# Allegro board isolated_v-i_dac.brd
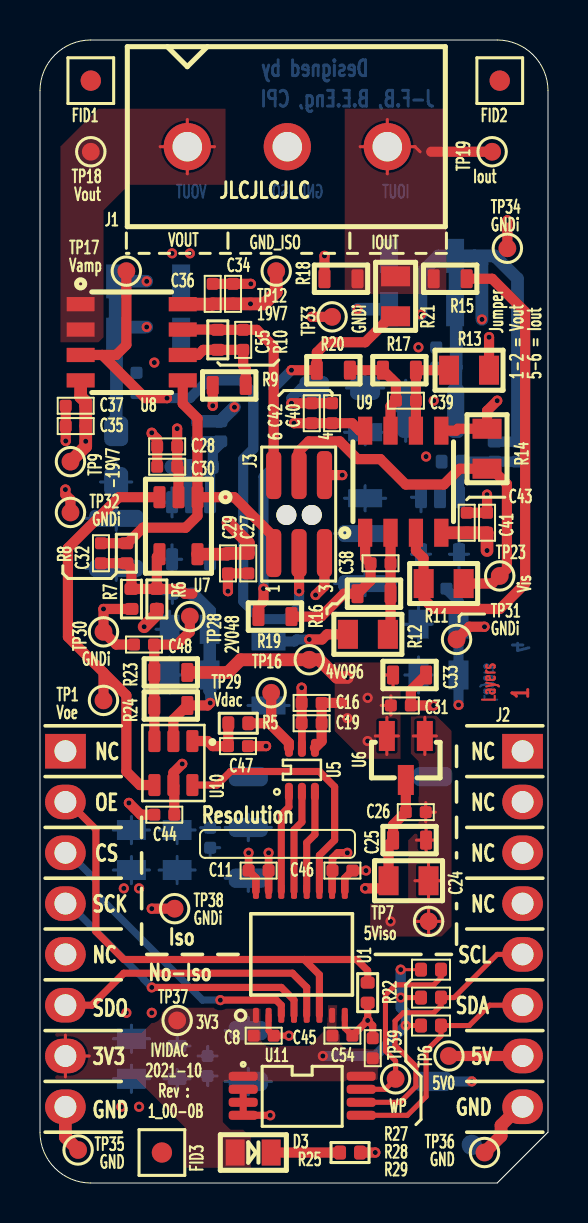
[diagram p0: board, top side]
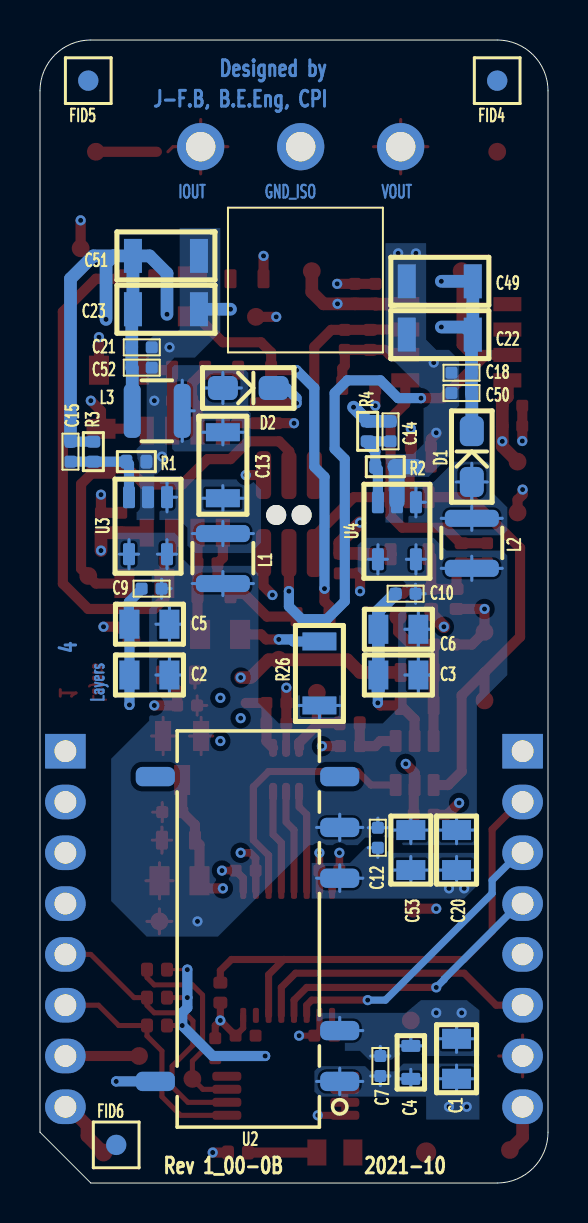
[diagram p1: board, bottom side, seen from below]

Outline 25.4 x 57.15 mm; copper layers: TOP, INNER1, INNER2, BOTTOM. Coordinates in mm from the lower left corner of the outline.
Outline path: 0,54.61 0,2.54 arc(0.74,0.74) 2.54,0 22.86,0 25.4,2.54 25.4,54.61 arc(24.66,56.41) 22.86,57.15 2.54,57.15 arc(0.74,56.41) 0,54.61

## Design rules (mm)
constraint set DEFAULT: min track width 0.152

## Placement (name value [footprint] x y rotation side)
C1  10uF  [0805_CAP]  4.57 7.11 270 bottom
C2  22uF  [0805_CAP]  20.83 25.4 180 bottom
C3  22uF  [0805_CAP]  8.38 25.4 180 bottom
C4  1uF  [0603_CAP_IPC]  6.86 6.86 270 bottom
C5  22uF  [0805_CAP]  20.83 27.94 180 bottom
C6  22uF  [0805_CAP]  8.38 27.69 180 bottom
C7  0.1uF  [0402_CAP_IPC]  8.38 6.35 270 bottom
C8  0.1uF  [0402_CAP_IPC]  11.68 7.37 180 top
C9  0.1uF  [0402_CAP_IPC]  20.32 29.72 180 bottom
C10  0.1uF  [0402_CAP_IPC]  7.62 29.46 180 bottom
C11  0.1uF  [0402_CAP_IPC]  11.43 15.62 180 top
C12  0.1uF  [0402_CAP_IPC]  8.51 16.76 90 bottom
C13  1uF  [1206_CAP]  16.26 37.34 270 bottom
C14  680pF  [0402_CAP_IPC]  7.87 37.08 90 bottom
C15  560pF  [0402_CAP_IPC]  23.88 36.07 90 bottom
C16  0.1uF  [0402_CAP_IPC]  13.08 24 0 top
C18  0.1uF  [0402_CAP_IPC]  4.83 40.51 180 bottom
C19  10nF  [0402_CAP_IPC]  13.08 22.99 0 top
C20  10uF  [0805_CAP]  4.57 15.75 90 bottom
C21  0.1uF  [0402_CAP_IPC]  19.81 41.78 0 bottom
C22  10uF  [1206_CAP]  6.86 42.42 180 bottom
C23  10uF  [1206_CAP]  17.65 43.69 0 bottom
C24  10uF  [0805_CAP]  17.53 15.11 0 top
C25  1uF  [0603_CAP_IPC]  17.65 17.14 0 top
C26  0.1uF  [0402_CAP_IPC]  18.29 18.54 0 top
C27  0.1uF  [0402_CAP_IPC]  10.41 30.48 90 top
C28  0.1uF  [0402_CAP_IPC]  6.86 36.83 180 top
C29  10nF  [0402_CAP_IPC]  9.4 30.48 90 top
C30  10nF  [0402_CAP_IPC]  6.86 35.81 180 top
C31  0.1uF  [0402_CAP_IPC]  18.54 23.88 180 top
C32  22pF  [0402_CAP_IPC]  3.05 30.99 90 top
C33  1uF  [0603_CAP_IPC]  19.3 25.4 180 top
C34  0.1uF  [0402_CAP_IPC]  9.65 44.96 270 top
C35  0.1uF  [0402_CAP_IPC]  2.29 37.85 180 top
C36  10nF  [0402_CAP_IPC]  8.64 44.96 270 top
C37  10nF  [0402_CAP_IPC]  2.29 38.86 180 top
C38  100pF  [0402_CAP_IPC]  17.53 30.99 180 top
C39  100pF  [0402_CAP_IPC]  18.8 39.12 180 top
C40  0.1uF  [0402_CAP_IPC]  13.59 38.99 270 top
C41  0.1uF  [0402_CAP_IPC]  22.35 32.51 90 top
C42  10nF  [0402_CAP_IPC]  14.61 38.99 270 top
C43  10nF  [0402_CAP_IPC]  21.34 32.51 90 top
C44  0.1uF  [0402_CAP_IPC]  5.71 18.41 0 top
C45  0.1uF  [0402_CAP_IPC]  15.62 7.37 180 top
C46  0.1uF  [0402_CAP_IPC]  15.62 15.62 180 top
C47  1nF  [0402_CAP_IPC]  9.4 21.84 0 top
C48  0.1uF  [0402_CAP_IPC]  4.7 26.92 0 top
C49  10uF  [1206_CAP]  6.86 45.09 180 bottom
C50  1nF  [0402_CAP_IPC]  4.83 39.5 180 bottom
C51  10uF  [1206_CAP]  17.65 46.35 0 bottom
C52  1nF  [0402_CAP_IPC]  19.81 40.77 0 bottom
C53  10uF  [0805_CAP]  6.86 15.75 90 bottom
C54  0.1uF  [0402_CAP_IPC]  16.64 7.24 270 top
C55  22pF  [0402_CAP_IPC]  10.16 41.66 90 top
D1  SD103AWS-TP  [SOD323]  3.81 35.05 90 bottom
D2  SD103AWS-TP  [SOD323]  16.26 39.75 180 bottom
D3  LED GREEN  [0603_LED]  11.56 1.52 180 top
FID1  Fiducial  [FIDUCIAL_CIR40MIL]  2.54 55.12 0 top
FID2  Fiducial  [FIDUCIAL_CIR40MIL]  22.99 55.12 0 top
FID3  Fiducial  [FIDUCIAL_CIR40MIL]  6.1 1.52 0 top
FID4  Fiducial  [FIDUCIAL_CIR40MIL]  2.54 55.12 180 bottom
FID5  Fiducial  [FIDUCIAL_CIR40MIL]  22.99 55.12 180 bottom
FID6  Fiducial  [FIDUCIAL_CIR40MIL]  21.59 1.91 180 bottom
J1  HEADER 3  [PHOENIX3]  7.37 51.82 0 top
J2  ClickBoard  [MIKROBUS-CLICKBOARD]  -1.27 1.27 0 top
J3  Header 2x3 1,27mm  [HEADER2X3_1_27MM_POST]  11.68 31.5 0 top
L1  10uH  [IND_1008]  16.26 29.97 90 bottom
L2  10uH  [IND_1008]  3.81 30.73 90 bottom
L3  10uH  [IND_1008]  18.29 38.61 0 bottom
R1  1K96  [0402_RES_IPC]  21.08 36.07 180 bottom
R2  13K30  [0402_RES_IPC]  8.64 35.81 180 bottom
R3  29K4  [0402_RES_IPC]  22.73 36.07 90 bottom
R4  200K  [0402_RES_IPC]  9.02 37.08 90 bottom
R5  2K74  [0402_RES_IPC]  10.41 22.99 180 top
R6  5K90  [0402_RES_IPC]  5.84 28.7 90 top
R7  8K450  [0402_RES_IPC]  4.57 28.7 90 top
R8  16K20  [0402_RES_IPC]  4.32 30.99 90 top
R9  10K0  [0603_RES_IPC]  10.29 39.88 180 top
R10  5K90  [0402_RES_IPC]  8.89 41.66 90 top
R11  453K  [0805_RES_IPC]  21.08 29.97 180 top
R12  453K  [0805_RES_IPC]  15.49 27.43 0 top
R13  453K  [0805_RES_IPC]  22.35 40.64 180 top
R14  453K  [0805_RES_IPC]  22.35 35.81 90 top
R15  10K0  [0603_RES_IPC]  21.34 45.21 180 top
R16  10K0  [0603_RES_IPC]  17.53 29.46 180 top
R17  10K0  [0603_RES_IPC]  18.8 40.64 180 top
R18  10K0  [0603_RES_IPC]  14.22 45.21 0 top
R19  15R0  [0603_RES_IPC]  10.92 28.32 0 top
R20  15R0  [0603_RES_IPC]  15.49 40.64 180 top
R21  10R0  [0805_RES_IPC]  17.78 43.43 90 top
R22  10K0  [0402_RES_IPC]  16.38 9.02 90 top
R23  10K0  [0603_RES_IPC]  7.37 25.53 180 top
R24  10K0  [0603_RES_IPC]  5.71 23.88 0 top
R25  1K96  [0402_RES_IPC]  16 1.52 180 top
R26  249R  [1206_RES]  11.43 23.88 90 bottom
R27  10K0  [0402_RES_IPC]  19.05 10.67 0 top
R28  10K0  [0402_RES_IPC]  19.05 9.27 0 top
R29  10K0  [0402_RES_IPC]  19.05 7.87 0 top
TP1  test_pad  [TEST_PAD_CIR_35MIL]  3.17 24.13 0 top
TP6  test_pad  [TEST_PAD_CIR_35MIL]  20.45 6.35 0 top
TP7  test_pad  [TEST_PAD_CIR_35MIL]  19.43 13.08 0 top
TP9  test_pad  [TEST_PAD_CIR_35MIL]  1.52 36.07 0 top
TP12  test_pad  [TEST_PAD_CIR_35MIL]  11.81 45.59 0 top
TP16  test_pad  [TEST_PAD_CIR_35MIL]  13.46 26.16 0 top
TP17  test_pad  [TEST_PAD_CIR_35MIL]  4.32 45.59 0 top
TP18  test_pad  [TEST_PAD_CIR_35MIL]  2.54 51.56 0 top
TP19  test_pad  [TEST_PAD_CIR_35MIL]  22.61 51.56 0 top
TP23  test_pad  [TEST_PAD_CIR_35MIL]  22.99 30.35 0 top
TP28  test_pad  [TEST_PAD_CIR_35MIL]  7.49 28.32 0 top
TP29  test_pad  [TEST_PAD_CIR_35MIL]  11.56 24.51 0 top
TP30  test_pad  [TEST_PAD_CIR_35MIL]  3.17 27.56 0 top
TP31  test_pad  [TEST_PAD_CIR_35MIL]  20.83 27.18 0 top
TP32  test_pad  [TEST_PAD_CIR_35MIL]  1.52 33.53 0 top
TP33  test_pad  [TEST_PAD_CIR_35MIL]  14.61 43.31 0 top
TP34  test_pad  [TEST_PAD_CIR_35MIL]  23.37 46.74 0 top
TP35  test_pad  [TEST_PAD_CIR_35MIL]  1.91 1.65 0 top
TP36  test_pad  [TEST_PAD_CIR_35MIL]  22.23 1.52 0 top
TP37  test_pad  [TEST_PAD_CIR_35MIL]  6.86 8.13 0 top
TP38  test_pad  [TEST_PAD_CIR_35MIL]  6.73 13.72 0 top
TP39  test_pad  [TEST_PAD_CIR_35MIL]  17.78 5.21 0 top
U1  ADUM7440ARQZ  [QSOP-16]  10.79 8.38 0 top
U2  DCPA10505P-U/700  [DCPA10505P]  10.41 5.08 90 bottom
U3  LM2611BMF  [SOT23-5]  19.05 34.29 0 bottom
U4  LMR64010XMFE/NOPB  [SOT23-5]  6.6 34.04 0 bottom
U5  AD5641BKSZ  [SC70-6]  12.45 19.56 0 top
U6  REF3140AQDBZRQ1  [SOT23-3]  19.3 22.35 270 top
U7  TLV9351IDBVR  [SOT23-5]  7.87 34.29 180 top
U8  TLV9352IDR  [SOIC-8]  2.03 43.94 0 top
U9  TLV9352IDR  [SOIC-8]  16.26 32.51 90 top
U10  74LVC1G3157  [SOT23-6]  7.62 22.1 180 top
U11  24LC512-I/ST  [TSSOP8_4MM_065MM]  10.16 5.33 0 top

## Library data of the parts
C1-C16 C18-C55 = CAP-NP
D1 D2 = Diode Schottky
D3 = LED
FID1-FID6 = Fiducial
J1 = HEADER 3
J2 = ClickBoard-add-on_0
J3 = Header2x3_1_27mm
L1-L3 = Inductor
R1-R29 = Resistor
TP1 TP6 TP7 TP9 TP12 TP16-TP19 TP23 TP28-TP39 = test_pad
U1 = ADuM7440ARQZ
U2 = DCPA10505P
U3 = LM2611BMF
U4 = LMR64010XMFE
U5 = AD5641
U6 = REF3140AQDBZR
U7 = TLV9351IDBVR
U8 U9 = TLV9352IDR
U10 = 74LVC1G3157
U11 = IC_EEPROM_512Kx8_I2C_TSSOP8

## Footprints (pads in the part's own frame, mm; a bottom-side part is the same pattern mirrored in y, then rotated)
0402_CAP_IPC
  rrect 0.6x0.6 smd: 1(0,0) 2(1,0)
0402_RES_IPC
  rrect 0.6x0.7 smd: 1(0,0) 2(1,0)
0603_CAP_IPC
  rrect 0.6x0.95 smd: 1(0,0) 2(1.651,0)
0603_LED
  rect 0.95x1.3 smd: 1(0,0) 2(1.8,0)
0603_RES_IPC
  rrect 0.6x0.95 smd: 1(0,0) 2(1.651,0)
0805_CAP
  rect 1x1.45 smd: 1(-0.1,0) 2(1.9,0)
0805_RES_IPC
  rect 1x1.45 smd: 1(-0.1,0) 2(1.9,0)
1206_CAP
  rect 0.9x1.7 smd: 1(-0.2,0) 2(3.1,0)
1206_RES
  rect 0.9x1.7 smd: 1(0,0) 2(3.2,0)
DCPA10505P
  rrect 0.965x1.956 smd: 1(0,0) 2(2.54,0) 3(10.16,0) 4(12.7,0) 5(15.24,0) 6(15.24,9.22) 7(0,9.22)
FIDUCIAL_CIR40MIL
  round 1.016 smd: 1(0,0)
HEADER2X3_1_27MM_POST
  round 1 hole 1 unplated: (0.635,1.905) (1.905,1.905)
  rrect 0.76x2.4 smd: 1(0,0) 2(1.27,0) 3(2.54,0) 4(2.54,3.9) 5(1.27,3.9) 6(0,3.9)
IND_1008
  rrect 0.85x2.7 smd: 1(0,0) 2(2.5,0)
MIKROBUS-CLICKBOARD
  rect 2.032x1.727 hole 1.092: 1(2.54,20.32) 16(25.4,20.32)
  oval 2.032x1.727 hole 1.092: 2(2.54,17.78) 3(2.54,15.24) 4(2.54,12.7) 5(2.54,10.16) 6(2.54,7.62) 7(2.54,5.08) 8(2.54,2.54) 9(25.4,2.54) 10(25.4,5.08) 11(25.4,7.62) 12(25.4,10.16) 13(25.4,12.7) 14(25.4,15.24) 15(25.4,17.78)
PHOENIX3
  round 2.362 hole 1.473: 1(0,0) 2(5,0) 3(10,0)
QSOP-16
  rrect 0.3x0.75 smd: 1(0,0) 2(0.635,0) 3(1.27,0) 4(1.905,0) 5(2.54,0) 6(3.175,0) 7(3.81,0) 8(4.445,0) 9(4.445,6.198) 10(3.81,6.198) 11(3.175,6.198) 12(2.54,6.198) 13(1.905,6.198) 14(1.27,6.198) 15(0.635,6.198) 16(0,6.198)
SC70-6
  rrect 0.4x0.9 smd: 1(0,0) 2(0.65,0) 3(1.3,0) 4(1.3,2.2) 5(0.65,2.2) 6(0,2.2)
SOD323
  rrect 1.5x1.2 smd: 1(0,0) 2(2.54,0)
SOIC-8
  rect 1.397x0.711 smd: 1(0,0) 2(0,-1.27) 3(0,-2.54) 4(0,-3.81) 5(5.105,-3.81) 6(5.105,-2.54) 7(5.105,-1.27) 8(5.105,0)
SOT23-3
  rect 1.5x0.8 smd: 1(0,-0.061) 2(0,-1.961) 3(2.2,-1.011)
SOT23-5
  rrect 0.6x1.1 smd: 1(0,0) 2(0.95,0) 3(1.9,0) 4(1.9,2.85) 5(0,2.85)
SOT23-6
  rrect 0.6x1.1 smd: 1(0,0) 2(0.95,0) 3(1.9,0) 4(1.9,2.2) 5(0.95,2.2) 6(0,2.2)
TEST_PAD_CIR_35MIL
  round 0.889 smd: 1(0,0)
TSSOP8_4MM_065MM
  rrect 1.45x0.45 smd: 1(0,0) 2(0,-0.65) 3(0,-1.3) 4(0,-1.95) 5(5.9,-1.95) 6(5.9,-1.3) 7(5.9,-0.65) 8(5.9,0)

## Nets
2V048: C48.2 R23.2 R24.1 TP28.1(TEST) U10.3
3V3: C8.2 C45.2 C54.2 D3.2 J2.7 R27.1 R28.1 R29.1 TP37.1(TEST) U1.1 U1.7 U11.1 U11.8
4V096ISO: C11.2 C16.2 C19.2 C31.2 C33.2 C44.2 C46.2 R6.1 R23.1 TP16.1(TEST) U1.10(VDD2B) U1.16 U5.4(VREF) U6.2(VOUT) U10.5(VCC)
5V0: C1.2 C4.2 C7.2 J2.10 TP6.1(TEST) U2.1
5VISO: C2.2 C3.2 C5.2 C6.2 C9.2 C10.2 C12.2 C20.2 C24.2 C25.2 C26.2 C53.2 L1.1 L2.1 R26.1 TP7.1(TEST) U2.4 U3.4 U3.5(VIN) U4.4 U4.5(VIN) U6.1
19V7ISO: C14.2 C18.2 C22.2 C27.2 C29.2 C34.2 C36.2 C40.2 C42.2 C49.2 C50.2 D1.2(K) R4.2 TP12.1(TEST) U7.5 U8.8 U9.8
-19V7ISO: C15.2 C21.2 C23.2 C28.1 C30.1 C35.1 C37.1 C41.1 C43.1 C51.2 C52.2 L3.2 R3.2 TP9.1(TEST) U7.2(V-) U8.4(V-) U9.4(V-)
GND: C1.1 C4.1 C7.1 C8.1 C45.1 C54.1 J2.8 J2.9 R22.1 R25.1 TP35.1(TEST) TP36.1(TEST) U1.2 U1.8 U2.2 U2.7(SYNC) U11.2 U11.3 U11.4
GND_ISO: C2.1 C3.1 C5.1 C6.1 C9.1 C10.1 C11.1 C12.1 C16.1 C18.1 C19.1 C20.1 C21.1 C22.1 C23.1 C24.1 C25.1 C26.1 C27.1 C28.2 C29.1 C30.2 C31.1 C33.1 C34.1 C35.2 C36.1 C37.2 C40.1 C41.2 C42.1 C43.2 C44.1 C46.1 C47.2 C48.1 C49.1 C50.1 C51.1 C52.1 C53.1 D2.2(K) J1.2 J3.3 J3.4 R1.2 R2.2 R7.1 R9.2 R12.1 R13.1 R24.2 R26.2 TP30.1(TEST) TP31.1(TEST) TP32.1(TEST) TP33.1(TEST) TP34.1(TEST) TP38.1(TEST) U1.9 U1.15 U2.3 U3.2 U4.2 U5.5 U6.3 U10.2
DAC_CSN: J2.3 U1.3
DAC_MOSI: J2.6 U1.5
IOUT: J1.3 R15.2 R18.2 R21.2 TP19.1(TEST)
OUT_EN: J2.2 R22.2 U1.6
SCK: J2.4 U1.4
SCL: J2.12 R28.2 U11.6
SDA: J2.11 R29.2 U11.5
VAMP: J3.2 TP17.1(TEST) U8.3
VDAC: R5.1 TP29.1(TEST) U5.6
VDAC_FILT: C47.1 R5.2 U10.1
VISC: J3.5 R11.1 R14.1 TP23.1(TEST)
VOE: TP1.1(TEST) U7.3 U10.4
VOUT: J1.1 TP18.1(TEST) U8.1 U8.2
WP: R27.2 TP39.1(TEST) U11.7(WP)
N02659: C32.1 R6.2 R7.2 R8.1 U7.4
N02929: C32.2 J3.1 R8.2 U7.1 U8.5
N03627: C55.1 R9.1 R10.1 U8.6
N03989: R11.2 R15.1 U9.3
N04068: C38.2 R16.2 R19.2 U9.1
N04246: C38.1 R12.2 R16.1 U9.2
N08088: R14.2 R18.1 U9.5
N08142: C39.2 R17.2 R20.1 U9.7
N08158: C39.1 R13.2 R17.1 U9.6
N08933: R19.1 R20.2 R21.1
N30227: U1.14 U5.1
N30231: U1.13 U5.2
N30243: U1.12 U5.3
N36112: C13.2 L1.2 U3.1
N36135: C13.1 D2.1 L3.1
N37664: C15.1 R1.1 R3.1 U3.3
N40846: D1.1 L2.2 U4.1
N41384: C14.1 R2.1 R4.1 U4.3
N64354: U1.11 U10.6
N145790: D3.1(CATHODE) R25.2
N253978: C55.2 J3.6 R10.2 U8.7

Pads without a net: FID1 1; FID2 1; FID3 1; FID4 1; FID5 1; FID6 1; J2 1 5 13 14 15 16; U2 5 6

## Via types
v1: diameter 0.508, hole 0.254, TOP to BOTTOM, 76 vias

## Routing (per net, layer and track width the routed paths; a pad name or vN(x,y) marks a point on that pad's centre or on a via; arc(x,y) is an arc through that point)
2V048: length 7.7
  TOP w0.508: TP28.1 7.49,27.56 6.86,26.92 C48.2 5.71,26.91 R23.2 R24.1 5.72,23.87 U10.3
3V3: length 13.7
  TOP w0.152: 1.27,5.31 J2.7 ; J2.7 1.27,7.39 ; J2.7 2.46,6.35 ; R27.1 v1(18.03,10.67)
  TOP w0.254: R28.1 v1(18.03,9.27) ; R29.1 v1(18.29,7.87)
  BOTTOM w0.508: v1(14.14,6.35) 16.76,6.35 v1(18.29,7.87) 18.29,8.51 18.03,8.76 v1(18.03,9.27) v1(18.03,10.67)
4V096ISO: length 26.1
  TOP w0.152: 17.54,23.4 C31.2 ; C31.2 17.54,24.35 ; C31.2 17.06,23.88 ; U6.2 17.34,23.28 ; U6.2 17.34,21.42 ; U6.2 17.92,22.35 ; U6.2 16.76,22.35 ; 17.65,24.75 C33.2 17.17,25.4
  TOP w0.381: 14.86,25.27 14.8,25.34 ; U1.16 10.79,15.26 C11.2 v1(10.43,16.51) ; U1.10 14.61,15.6 C46.2 14.62,16.24 14.89,16.51 v1(15.37,16.51)
  TOP w0.508: C44.2 6.71,19.85 U10.5 6.67,20.51 v1(7.11,20.95) ; 15.11,24 C16.2 C19.2 14.08,22.09 U5.4
  TOP w0.635: v1(15.37,25.27) 14.86,25.27 ; R23.1 9.4,25.53 10.03,26.16 TP16.1 13.97,26.16 14.8,25.34 ; v1(5.21,27.81) 5.84,28.45 R6.1
  vias: v1(15.37,23.24) v1(16.38,24.26) v1(16.38,22.1)
5V0: length 17.5
  TOP w0.508: J2.10 TP6.1
  INNER2 w0.152: J2.10 24.13,7.39 ; J2.10 24.13,5.31 ; J2.10 22.94,6.35
  BOTTOM w0.152: U2.1 11.57,5.08 ; U2.1 9.26,5.08 ; U2.1 10.41,4.42 ; U2.1 10.41,5.74 ; 4.57,4.53 C1.2 ; C1.2 5.48,5.21 ; C1.2 3.67,5.21 ; C1.2 4.57,5.89 ; 8.38,4.87 C7.2 ; C7.2 8.86,5.35 ; C7.2 7.9,5.35 ; 6.2,5.21 C4.2 ; C4.2 6.86,5.69 ; C4.2 7.51,5.21 ; C4.2 6.86,4.73
  vias: v1(4.06,3.81) v1(4.95,3.81)
5VISO: length 60.2
  TOP w0.152: TP7.1 20.05,13.08 ; TP7.1 18.81,13.08 ; TP7.1 19.43,12.46 ; TP7.1 19.43,13.7 ; U6.1 19.24,23.28 ; U6.1 19.82,22.35 ; U6.1 18.66,22.35 ; U6.1 19.24,21.42 ; 18.75,15.11 C24.2 ; C24.2 19.43,14.21 ; C24.2 20.1,15.11 ; C24.2 19.43,16.02 ; 19.3,16.49 C25.2 ; C25.2 18.83,17.14 ; C25.2 19.3,17.8 ; C25.2 19.78,17.14 ; C26.2 19.77,18.54 ; C26.2 19.29,18.06 ; C26.2 19.29,19.02
  BOTTOM w0.152: 20.95,30.71 U3.4 ; U3.4 20.95,32.17 ; U3.4 20.47,31.44 ; U3.4 21.43,31.44 ; 18.93,24.5 C2.2 ; C2.2 18.93,26.3 ; C2.2 19.61,25.4 ; C2.2 18.25,25.4 ; C53.2 7.76,17.65 ; C53.2 5.95,17.65 ; C53.2 6.86,16.97 ; C53.2 6.86,18.33 ; 8.03,31.19 U4.4 ; U4.4 8.5,30.46 ; U4.4 8.5,31.91 ; U4.4 8.98,31.19 ; U3.5 19.05,32.17 ; U3.5 18.57,31.44 ; U3.5 19.53,31.44 ; U3.5 19.05,30.71 ; C3.2 7.16,25.4 ; C3.2 5.8,25.4 ; C3.2 6.48,24.5 ; C3.2 6.48,26.3 ; C6.2 7.16,27.69 ; C6.2 6.48,26.78 ; C6.2 6.48,28.59 ; C6.2 5.8,27.69 ; L1.1 17.78,29.97 ; L1.1 14.73,29.97 ; L1.1 16.26,30.58 ; L1.1 16.26,29.37 ; C5.2 19.61,27.94 ; C5.2 18.93,27.04 ; C5.2 18.25,27.94 ; C5.2 18.93,28.84 ; 11.43,23.25 R26.1 ; R26.1 12.46,23.88 ; R26.1 10.4,23.88 ; 3.81,30.13 L2.1 ; L2.1 5.34,30.73 ; L2.1 2.28,30.73 ; L2.1 3.81,31.34 ; C20.2 5.48,17.65 ; C20.2 4.57,16.97 ; C20.2 4.57,18.33 ; C20.2 3.67,17.65 ; U2.4 11.57,17.78 ; U2.4 10.41,18.44 ; U2.4 9.26,17.78 ; U2.4 10.41,17.12 ; 6.13,31.19 U4.5 ; U4.5 6.6,30.46 ; U4.5 7.08,31.19 ; U4.5 6.6,31.91 ; C10.2 6.62,29.94 ; C10.2 6.14,29.46 ; C10.2 6.62,28.99 ; 19.32,29.24 C9.2 ; C9.2 18.84,29.72 ; C9.2 19.32,30.2 ; 8.03,17.76 C12.2 ; C12.2 8.99,17.76 ; C12.2 8.51,18.24
  vias: v1(17.53,13.08)
19V7ISO: length 53
  TOP w0.508: U9.8 15.98,37.62 15.6,37.99 C42.2 C40.2 v1(12.7,37.99)
  TOP w0.635: TP12.1 11.81,44.55 11.22,43.96 v1(10.52,43.96) C34.2 C36.2 8.62,43.94 U8.8 ; U7.5 9.36,31.44 C29.2 C27.2 10.41,32 v1(9.4,33.02)
  INNER2 w0.635: v1(5.33,42.8) 7.24,42.8 9.72,40.31 v1(9.72,38.79) 9.72,38.09 9.4,37.77 v1(9.4,33.02) ; v1(5.33,45.09) 8.26,45.09 9.38,43.96 v1(10.52,43.96) 11.43,43.05 11.43,38.56 12,37.99 v1(12.7,37.99)
  BOTTOM w0.635: C22.2 4.14,42.8 v1(5.33,42.8) ; C22.2 C49.2 v1(5.33,45.09) ; C22.2 3.83,42.35 C18.2 C50.2 3.81,39.48 D1.2 ; v1(9.72,38.79) R4.2 C14.2
-19V7ISO: length 89.2
  TOP w0.508: v1(6.86,37.72) C28.1 C30.1 6.92,35.75 U7.2
  TOP w0.635: v1(22.35,31.62) C41.1 C43.1 U9.4 ; U8.4 2.03,39.31 2.29,39.06 C37.1 C35.1 v1(2.29,37.08) 2.29,36.83 TP9.1
  INNER2 w0.635: v1(2.29,37.08) 2.29,33.53 4.7,31.11 8.64,31.11 ; v1(22.35,31.62) 21.34,32.64 21.34,42.42 v1(22.1,43.18) ; v1(6.86,37.72) 6.86,32.89 8.64,31.11 ; 8.64,31.11 13.46,31.11 16.76,34.42 16.76,41.15 v1(19.05,43.43)
  BOTTOM w0.508: C15.2 R3.2
  BOTTOM w0.635: L3.2 20.79,40.74 C52.2 C21.2 20.81,43.63 C23.2 C51.2 ; C15.2 23.88,45.21 22.73,46.35 21.72,46.35 ; C51.2 19.92,46.35 19.05,45.48 v1(19.05,43.43) ; C51.2 21.72,46.35 ; 21.72,46.35 22.1,45.97 v1(22.1,43.18)
GND: length 31.7
  TOP w0.305: C45.1 15.24,7.75 U1.8 ; U1.2 11.43,7.62 C8.1 v1(12.45,7.37)
  TOP w0.356: v1(11.51,3.38) U11.4 U11.3 U11.2 ; R22.1 v1(16.38,8.13) ; v1(16.38,8.13) C45.1 ; v1(16.38,8.13) 16.64,7.87 C54.1
  TOP w0.508: R25.1 v1(16.76,1.52)
  TOP w0.635: J2.9 23.98,3.81 23.05,2.88 23.05,2.35 TP36.1 ; TP35.1 1.27,2.29 J2.8
  INNER1 w0.152: 1.27,2.77 J2.8 ; J2.8 1.27,4.85 ; J2.8 2.46,3.81 ; J2.9 24.13,4.85 ; J2.9 22.94,3.81 ; J2.9 24.13,2.77
  BOTTOM w0.152: C4.1 7.51,6.86 ; C4.1 6.86,7.34 ; C4.1 6.2,6.86 ; 10.41,8.28 U2.2 9.26,7.62 ; C7.1 8.38,6.83 ; C7.1 8.86,6.35 ; C7.1 7.9,6.35 ; C1.1 4.57,7.89 ; C1.1 5.48,7.21 ; C1.1 3.67,7.21 ; C1.1 4.57,6.53
  BOTTOM w0.508: U2.7 v1(21.59,5.08)
  vias: v1(4.32,8.51) v1(5.59,8.51)
GND_ISO: length 94.3
  TOP w0.381: 13.1,22.97 U5.5 ; U1.15 C11.1 v1(11.43,16.51) ; U1.9 15.24,15.24 C46.1 v1(16.3,15.62)
  TOP w0.508: R7.1 v1(3.17,28.7) TP30.1 3.81,26.92 C48.1 ; R13.1 v1(22.45,42.29) ; R12.1 14.35,27.43 14.1,27.18 v1(13.46,27.18) ; U6.3 18.29,18.55 C26.1 17.65,17.91 C25.1 17.43,16.92 C24.1 17.43,14.73 v1(16.26,14.73) ; TP34.1 v1(23.37,48.13) ; TP38.1 v1(5.59,13.72) ; v1(22.35,34.42) C41.2 C43.2 ; TP33.1 v1(13.59,43.31) ; v1(13.78,29.4) 14.22,29.84 J3.3 ; v1(22.23,27.81) 21.46,27.81 TP31.1 ; v1(19.68,23.88) C31.1 18.54,24.64 C33.1 ; v1(1.29,37.1) C35.2 C37.2 ; R9.2 v1(8.64,38.86) ; v1(15.11,35.4) J3.4 ; C36.1 C34.1 v1(10.54,44.96) ; U10.2 6.67,23.18 R24.2 8.38,23.88 v1(8.51,24) ; 13.1,22.97 C19.1 C16.1 v1(13.08,24.77) ; C44.1 5.03,18.41 v1(4.45,19) ; v1(9.4,29.59) C29.1 C27.1 ; v1(12.57,38.99) C40.1 C42.1 ; C30.2 C28.2 5.86,37.19 5.59,37.47 v1(5.59,37.51) ; v1(1.27,34.67) 1.27,34.42 1.52,34.16 TP32.1 ; C47.2 v1(11.3,21.84)
  INNER1 w0.152: J1.2 13.73,51.82 ; J1.2 12.37,50.46 ; J1.2 12.37,53.18 ; J1.2 11.01,51.82
  INNER2 w0.152: J1.2 12.37,53.18 ; J1.2 12.37,50.46 ; J1.2 11.01,51.82 ; J1.2 13.73,51.82
  BOTTOM w0.152: U2.3 10.41,15.9 ; U2.3 9.26,15.24 ; U2.3 11.57,15.24 ; U2.3 10.41,14.58 ; 3.67,15.65 C20.1 ; C20.1 4.57,16.33 ; C20.1 5.48,15.65 ; C20.1 4.57,14.97 ; 5.95,15.65 C53.1 ; C53.1 6.86,16.33 ; C53.1 6.86,14.97 ; C53.1 7.76,15.65 ; 8.99,16.76 C12.1 8.51,16.29
  BOTTOM w0.508: v1(13.46,27.18) 12.83,27.18 12.72,27.08 R26.2 ; v1(12.57,38.99) 12.57,39.24 13.08,39.75 D2.2 ; C9.1 20.32,29.68 20.95,29.05 20.95,27.97 C5.1 C2.1 v1(20.93,23.9) ; v1(8.51,24) 8.51,24.61
  BOTTOM w0.635: C10.1 8.48,28.6 C6.1 C3.1 8.48,24.64 8.51,24.61 ; C23.1 v1(15.88,43.69)
  BOTTOM w0.762: 6.6,35.81 R2.2 7.55,35.73 U4.2
  vias: v1(4.19,14.73) v1(4.95,14.73) v1(5.71,41.02) v1(6.6,46.48) v1(7.49,46.48) v1(18.92,41.78) v1(19.3,36.32) v1(19.68,39.12)
DAC_CSN: length 14.8
  TOP w0.356: U1.3 12.06,8.89 11.81,9.14 v1(9.02,9.14)
  BOTTOM w0.356: J2.3 1.42,16.51 2.79,15.14 2.79,14.48 8.13,9.14 v1(9.02,9.14)
DAC_MOSI: length 14.4
  TOP w0.356: J2.6 2.59,8.89 4.19,10.49 12.62,10.49 13.34,9.78 U1.5
IOUT: length 8.9
  TOP w0.152: J1.3 17.37,53.18 ; J1.3 17.37,50.46 ; J1.3 18.75,51.82 19,51.56 ; J1.3 16.01,51.82
  TOP w0.508: TP19.1 19.56,51.56
OUT_EN: length 25.3
  TOP w0.356: U1.6 13.97,10.41 13.21,11.18 ; 13.21,11.18 4.19,11.18 2.79,12.57 2.79,17.68 1.42,19.05 J2.2 ; 13.21,11.18 15.83,11.18 16.38,10.62 R22.2
SCK: length 14.2
  TOP w0.356: U1.4 12.7,9.14 12.06,9.78 v1(5.59,9.78)
  BOTTOM w0.356: J2.4 1.42,13.97 5.19,10.2 5.19,10.17 v1(5.59,9.78)
SCL: length 14.8
  TOP w0.254: U11.6 18,4.03 18.8,4.83 18.8,5.84 17.75,6.88 17.75,8.1 18.16,8.51 19.68,8.51 20.05,8.87 R28.2 20.7,9.27 22.86,11.43 J2.12
SDA: length 12
  TOP w0.254: J2.11 22.48,8.89 21.46,7.87 R29.2 20.05,7.35 19.3,6.6 19.3,4.32 18.37,3.38 U11.5
VAMP: length 32
  TOP w0.508: 3.11,41.4 5.27,39.24 v1(6.35,39.24) ; 3.11,41.4 3.81,41.4 4.32,41.91 TP17.1 ; 3.11,41.4 U8.3 ; J3.2 v1(12.95,29.59)
  BOTTOM w0.508: v1(12.95,29.59) 12.95,28.83 12.32,28.19 11.05,28.19 10.16,29.08 10.16,36.2 10.67,36.7 10.67,39.5 10.03,40.13 8.38,40.13 7.49,39.24 v1(6.35,39.24)
VDAC: length 4.2
  TOP w0.508: TP29.1 11.56,23.08 11.47,22.99 ; 11.47,22.99 12.45,22.01 U5.6 ; 11.47,22.99 R5.1
VDAC_FILT: length 3
  TOP w0.508: R5.2 9.41,21.86 C47.1 8.64,21.84 8.38,22.1 U10.1
VISC: length 20.9
  TOP w0.508: 12.95,36.22 J3.5 12.93,35.42 12.93,36.58 13.44,37.08 14.99,37.08 15.88,36.2 17.02,36.2 18.29,34.92 20.19,34.92 20.98,35.71 R14.1 22.58,35.71 23.35,34.94 23.35,30.71 TP23.1 22.61,29.97 R11.1
VOE: length 21.1
  TOP w0.508: U10.4 4.99,19.9 4.32,20.57 4.32,24.38 3.17,25.53 ; 3.17,25.53 TP1.1 ; 3.17,25.53 1.4,27.3 1.4,31.75 3.94,34.29 U7.3
VOUT: length 5.4
  TOP w0.152: 7.37,50.46 J1.1 ; J1.1 8.73,51.82 ; J1.1 7.37,53.18 ; J1.1 6.01,51.82
WP: length 9.9
  TOP w0.254: U11.7 17.26,4.68 TP39.1 17.78,6.1 17.27,6.6 17.27,9.4 17.78,9.91 19.68,9.91 20.05,10.27 R27.2
N02659: length 7.6
  TOP w0.508: 7.62,29.46 7.24,29.46 7,29.7 R6.2 ; R6.2 5.84,31.31 U7.4 ; R6.2 R7.2 4.57,30.73 R8.1 C32.1
N02929: length 17.9
  TOP w0.508: U7.1 9.71,34.29 11.68,32.32 J3.1 ; U7.1 7.87,33.36 7.28,32.77 5.15,32.77 4.37,31.99 R8.2 C32.2 ; U7.1 7.87,38.23 7.14,38.96 U8.5
N03627: length 5
  TOP w0.508: R9.1 10.29,40.73 10.16,40.86 C55.1 R10.1 8.16,41.66 7.9,41.4 U8.6
N03989: length 26.5
  TOP w0.508: U9.3 18.8,31.62 19.18,31.24 19.18,29.98 R11.2 19.18,29.21 19.69,28.7 22.99,28.7 24.26,29.97 24.26,43.56 22.61,45.21 R15.1
N04068: length 7.2
  TOP w0.508: R19.2 14.05,28.32 15.19,29.46 R16.2 16.53,30.12 C38.2 16.26,31.26 U9.1
N04246: length 5.1
  TOP w0.508: U9.2 C38.1 R16.1 17.53,27.56 R12.2
N08088: length 21.1
  TOP w0.508: R18.1 v1(14.22,46.35) ; U9.5 20.8,37.62 20.9,37.71 R14.2 22.35,38.61 v1(22.86,39.12)
  INNER2 w0.508: v1(22.86,39.12) 23.62,39.88 23.62,44.7 21.97,46.35 v1(14.22,46.35)
N08142: length 5.1
  TOP w0.508: U9.7 17.53,38.85 C39.2 17.8,39.99 R17.2 R20.1
N08158: length 4.7
  TOP w0.508: R13.2 R17.1 C39.1 U9.6
N08933: length 19.8
  TOP w0.508: v1(11.18,29.72) 11.18,29.08 10.92,28.83 R19.1 ; v1(12.57,40.64) R20.2 13.84,41.53 14.35,42.04 16.26,42.04 17.55,43.33 R21.1
  BOTTOM w0.508: v1(12.57,40.64) 11.68,39.75 11.68,35.81 11.18,35.31 v1(11.18,29.72)
N30227: length 5.1
  TOP w0.356: U5.1 12.45,18.8 12.06,18.42 U1.14
N30231: length 5.1
  TOP w0.356: U1.13 12.7,17.65 13.1,18.05 U5.2
N30243: length 5.1
  TOP w0.356: U5.3 13.75,17.43 13.34,17.02 U1.12
N36112: length 9.5
  BOTTOM w0.152: C13.2 17.28,34.24 ; C13.2 15.23,34.24 ; C13.2 16.26,34.87 ; C13.2 16.26,33.61 ; L1.2 16.26,33.08 ; L1.2 17.78,32.47 ; L1.2 16.26,31.87 ; L1.2 14.73,32.47 ; 18.57,34.29 U3.1 ; U3.1 19.05,33.56 ; U3.1 19.05,35.02
N36135: length 10.4
  BOTTOM w0.152: C13.1 16.26,38.17 ; C13.1 16.26,36.91 ; C13.1 17.28,37.54 ; C13.1 15.23,37.54 ; 15.33,39.75 D2.1 ; D2.1 16.26,38.97 ; D2.1 16.26,40.53 ; D2.1 17.18,39.75 ; L3.1 18.29,40.14 ; L3.1 17.68,38.61 ; L3.1 18.29,37.08
N37664: length 4.6
  BOTTOM w0.508: C15.1 R3.1 R1.1 20.95,35.94 U3.3
N40846: length 9.6
  BOTTOM w0.152: 3.81,32.63 L2.2 ; L2.2 2.28,33.23 ; L2.2 3.81,33.84 ; L2.2 5.34,33.23 ; U4.1 6.6,34.76 ; U4.1 6.6,33.31 ; U4.1 6.13,34.04 ; 3.03,35.05 D1.1 ; D1.1 3.81,34.12 ; D1.1 4.59,35.05 ; D1.1 3.81,35.98
N41384: length 4.4
  BOTTOM w0.508: C14.1 R4.1 9.02,36.96 8.64,36.58 R2.1 8.5,35.68 U4.3
N64354: length 13.3
  TOP w0.356: U10.6 8.85,19.9 9.53,20.57 13.97,20.57 14.73,19.81 14.73,17.14 13.97,16.38 U1.11
N145790: length 3.4
  TOP w0.508: D3.1 R25.2
N253978: length 11.3
  TOP w0.508: J3.6 11.68,41.81 10.84,42.66 C55.2 R10.2 8.87,42.67 U8.7

## Copper pours and planes (outline as drawn; the poured copper is in the pictures)
3V3 on TOP: 14.35,8.89 14.86,8.89 14.86,7.87 14.99,7.75 14.99,6.99 15.24,6.73 16.89,6.73 17.02,6.6 17.02,5.84 16.89,5.71 16.89,5.08 9.14,5.08 9.14,3.05 9.53,2.67 10.16,2.67 10.54,2.29 10.54,0.76 7.24,0.76 7.24,2.79 4.83,5.21 0.76,5.21 0.76,7.49 5.08,7.49 6.35,8.76 10.03,8.76 10.16,8.89 11.05,8.89 11.05,7.11 11.3,6.86 13.46,6.86 14.35,7.75
4V096ISO on TOP: 14.73,26.04 18.03,26.04 18.03,21.21 16.13,21.21 14.73,22.61
4V096ISO on INNER2: 17.27,26.04 10.03,26.04 7.37,28.7 4.19,28.7 4.19,26.67 6.1,24.77 6.1,19.18 9.78,19.18 9.78,15.49 17.27,15.49
5V0 on BOTTOM: 3.43,5.97 3.43,3.17 6.1,3.17 6.1,4.32 11.43,4.32 11.68,4.57 11.68,5.59 11.43,5.84 9.14,5.84 8.89,5.59 7.62,5.59 7.24,5.97
5V0 on INNER2: 2.67,10.67 22.73,10.67 22.73,7.49 24.64,7.49 24.64,4.95 22.73,4.95 22.73,0.89 22.61,0.76 2.67,0.76
5VISO on TOP: 19.81,23.37 20.57,22.61 20.57,12.83 20.07,12.32 16.51,12.32 16.51,13.97 18.41,13.97 18.41,17.14 18.92,17.65 18.92,21.08 18.54,21.46 18.54,23.37
5VISO on BOTTOM: 18.67,32.51 21.72,32.51 21.72,30.35 19.81,30.35 19.81,28.83 19.94,28.7 19.94,23.11 21.84,21.21 21.84,14.1 20.07,12.32 16.51,12.32 11.94,16.89 9.53,16.89 9.14,17.27 7.62,17.27 7.24,16.89 3.56,16.89 3.56,23.88 2.03,25.4 2.03,31.37 2.29,31.62 5.08,31.62 5.71,32.26 9.14,32.26 9.53,31.88 9.53,30.61 9.14,30.23 7.37,30.23 7.11,29.97 7.11,28.83 7.49,28.45 7.49,23.75 8.26,22.99 10.29,22.99 10.29,24.38 12.57,24.38 12.57,22.99 13.46,22.99 14.48,24 14.48,30.48 14.86,30.86 17.91,30.86 18.41,31.37 18.41,32.26
GND on BOTTOM: 4.06,9.14 3.43,8.64 3.43,6.35 7.62,6.35 8,5.97 8.76,5.97 9.4,6.6 10.16,6.6 10.16,6.99 11.56,6.99 11.56,8.38 11.43,8.51 7.11,8.51 6.35,9.14
GND on INNER1: 2.67,11.43 22.73,11.43 22.73,4.95 24.64,4.95 24.64,2.79 22.61,0.76 2.29,0.76 2.28,0.76 1.28,1.11 0.76,2.03 0.76,2.03 0.76,2.29 0.76,4.95 2.67,4.95
GND_ISO on BOTTOM: 19.56,33.15 20.57,33.15 20.57,36.7 20.07,37.21 20.07,42.04 19.56,42.55 18.54,42.55 18.41,42.67 18.41,47.75 16.38,47.75 16.38,42.55 17.65,41.27 18.67,41.27 19.05,40.89 19.05,35.94 19.56,35.43
GND_ISO on BOTTOM: 8.13,46.99 8.13,41.53 6.22,39.62 6.22,36.96 6.73,36.45 8.13,36.45 8.13,33.02 6.99,33.02 6.99,35.31 5.97,35.31 4.83,36.45 4.83,38.48 4.45,38.86 4.45,41.15 4.95,41.66 5.59,41.66 6.1,42.16 6.1,46.99
GND_ISO on BOTTOM: 11.81,16 9.91,16 8.76,17.14 8.13,17.14 8,17.02 8,16.64 7.87,16.51 3.56,16.51 3.56,14.86 4.19,14.22 11.81,14.22
GND_ISO on INNER1, INNER2: 22.86,56.39 22.92,56.39 22.99,56.39 24.11,55.95 24.64,54.86 24.64,54.61 24.64,27.3 23.37,27.3 23.37,24 21.84,24 21.84,14.1 20.07,12.32 6.1,12.32 3.56,14.86 3.56,24 0.76,24 0.76,54.86 0.76,54.87 1.38,55.94 2.53,56.39 2.54,56.39
IOUT on TOP: 20.32,53.72 15.24,53.72 15.24,44.45 20.32,44.45
VOUT on TOP: 2.92,53.72 9.27,53.72 9.27,49.91 4.45,49.91 3.17,48.64 3.17,42.29 2.92,42.04 1.02,42.04 1.02,51.82
N36112 on BOTTOM: 14.86,35.18 19.43,35.18 19.43,33.15 18.41,33.15 18.03,32.77 18.03,31.88 17.65,31.5 14.86,31.5 14.35,32 14.35,34.67
N36135 on BOTTOM: 18.8,40.77 18.8,36.7 18.67,36.58 15.11,36.58 14.86,36.83 14.86,38.48 14.99,38.61 14.99,40.51 15.37,40.89 18.67,40.89
N40846 on BOTTOM: 4.7,36.07 3.05,36.07 2.79,35.81 2.79,34.54 2.03,33.78 2.03,32.64 2.29,32.38 5.33,32.38 5.97,33.02 6.99,33.02 6.99,35.05 5.71,35.05

## Text on the board
BOTTOM: VOUT | GND_ISO | IOUT | Layers | Designed by | J-F.B, B.E.Eng, CPI | 4
Ref Des/Silkscreen Bottom: 2021-10 | Rev 1_00-0B
TOP: Layers | 1
Ref Des/Silkscreen Top: Voe | Vamp | Vout | GNDi | GND | 2021-10 | 1_00-0B | IVIDAC | Rev : | VOUT | 3V3 | Vdac | GND_ISO | 19V7 | 4V096 | 5Viso | IOUT | WP | 5V0 | Iout | -19V7 | 2V048 | Jumper | 1-2 = Vout | Vis | 5-6 = Iout | No-Iso | Iso | Resolution | JLCJLCJLC
INNER1: 2
INNER2: 3
XSECTION_CHART: *  SURFACE - AIR 0 MIL(+0/-0) | L1 TOP CONDUCTOR - COPPER 1.4 MIL(+0/-0) | *  DIELECTRIC - FR-4 8 MIL(+0/-0) | L2 INNER1 PLANE - COPPER 0.7 MIL(+0/-0) | *  DIELECTRIC - FR-4 42 MIL(+0/-0) | L3 INNER2 PLANE - COPPER 0.7 MIL(+0/-0) | L4 BOTTOM CONDUCTOR - COPPER 1.4 MIL(+0/-0) | DESIGN CROSS SECTION CHART | ___________________________ | TOTAL THICKNESS 62.2 MIL | 1-4
NCLEGEND-1-4: FIGURE | FINISHED_SIZE | 10.0 | 43.0 | 58.0 | 39.37 | DRILL CHART: TOP to BOTTOM | ALL UNITS ARE IN MILS | TOLERANCE_DRILL | +3.0/-3.0 | +1.97/-1.97 | PLATED | NON-PLATED | QTY | 77 | 16 | 3 | 2 | 98 | TOTAL HOLES:
